# EAGLE board smp-mm (EAGLE 7.2.0)
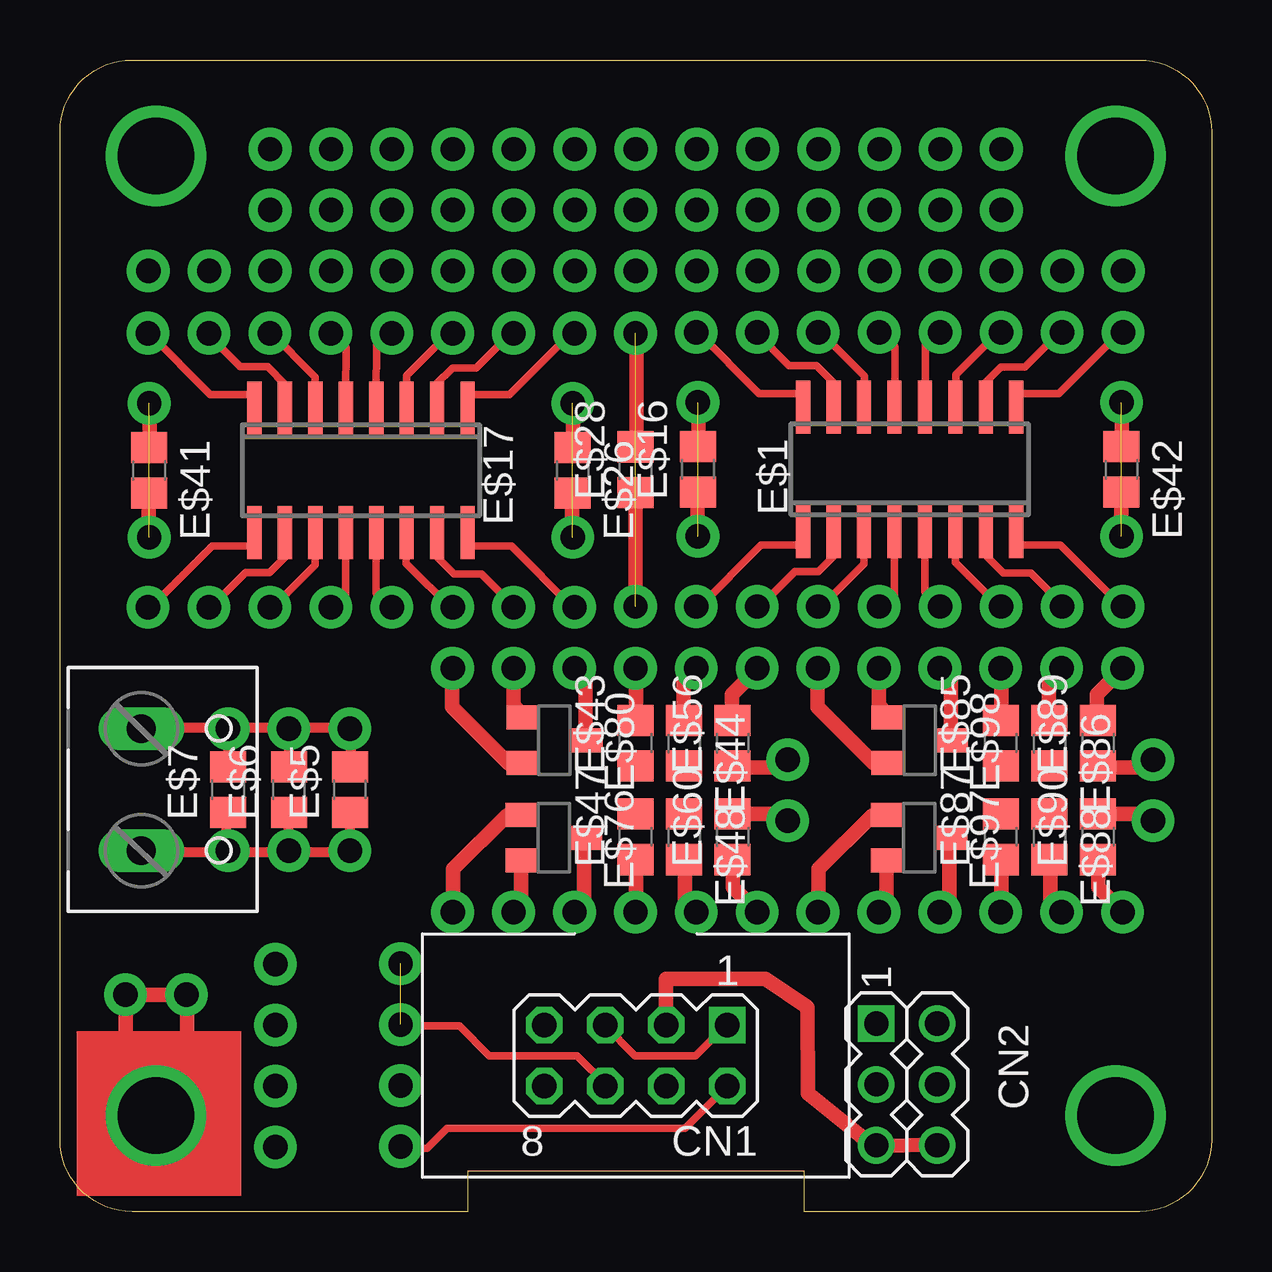
[diagram p0: board, top side]
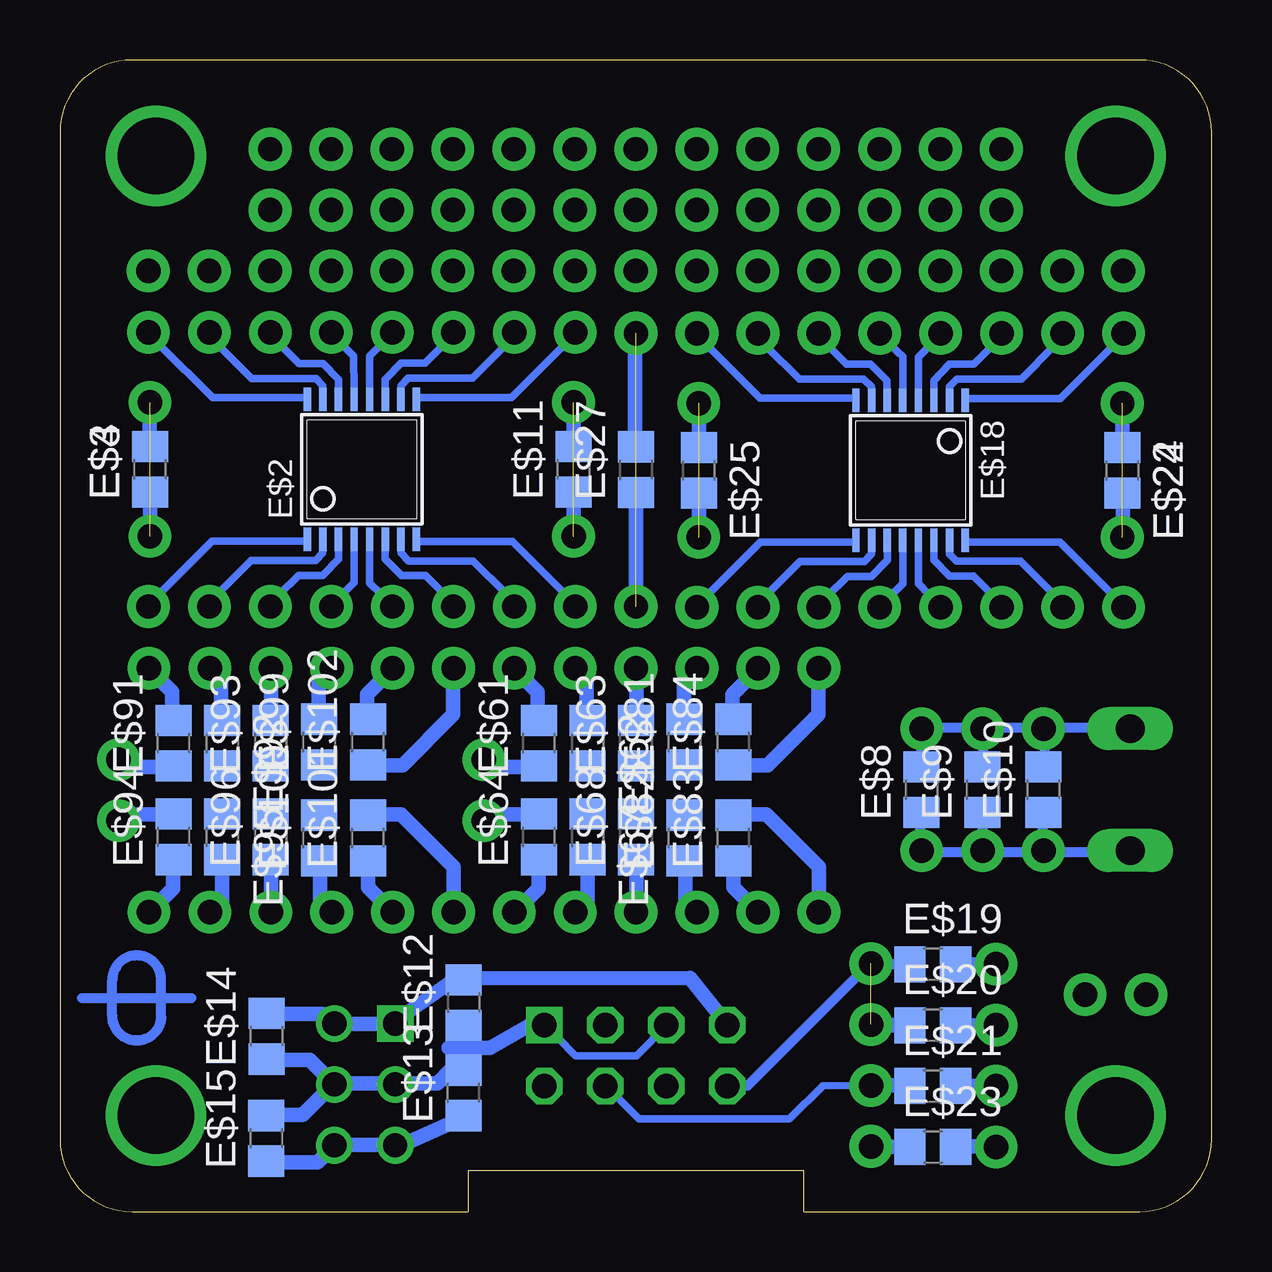
[diagram p1: board, bottom side, seen from below]

Size 48 x 48 mm. Coordinates in mm from the lower left corner, seen from the top.
Outline: 17,0 3,0 arc-90 0,3 0,45 arc-90 3,48 45,48 arc-90 48,45 48,3 arc-90 45,0 31,0 31,1.7 17,1.7 17,0
Copper layers (1*16): Top 0.035mm / dielectric 1.5mm / Bottom 0.035mm
Design rules "default *": minimum track width 10mil, minimum drill 24mil, track to track 12mil, track to pad 12mil, pad to pad 12mil, via to via 12mil, smd to smd 10mil, copper to edge 20mil, drill to drill 12mil, minimum pad ring 10mil, minimum via ring 8mil, stop-mask expansion 4mil, vias tented up to drill 29mil, thermal gap 10mil

## Footprints (pad centres in the part's own frame; a part is rotated, then mirrored left to right if it is on the bottom)
HDR-4X2 = drill 1.016 square: 1 -3.81,-1.27 | drill 1.016 octagon: 2 -3.81,1.27; 3 -1.27,-1.27; 4 -1.27,1.27; 5 1.27,-1.27; 6 1.27,1.27; 7 3.81,-1.27; 8 3.81,1.27
HDR-3X2 = drill 1.016 square: 1 -2.54,-1.27 | drill 1.016: 2 -2.54,1.27; 3 0,-1.27; 4 0,1.27; 5 2.54,-1.27; 6 2.54,1.27
TBLK-5.08-X2 = drill 1.194 long: 1 -2.54,-0.127; 2 2.54,-0.127
SO16 = smd 0.6 x 2.2: 1 -4.445,-2.6; 2 -3.175,-2.6; 3 -1.905,-2.6; 4 -0.635,-2.6; 5 0.635,-2.6; 6 1.905,-2.6; 7 3.175,-2.6; 8 4.445,-2.6; 9 4.445,2.6; 10 3.175,2.6; 11 1.905,2.6; 12 0.635,2.6; 13 -0.635,2.6; 14 -1.905,2.6; 15 -3.175,2.6; 16 -4.445,2.6
TSSOP16 = smd 0.305 x 0.991: 1 -2.275,-2.918; 2 -1.625,-2.918; 3 -0.975,-2.918; 4 -0.325,-2.918; 5 0.325,-2.918; 6 0.975,-2.918; 7 1.625,-2.918; 8 2.275,-2.918; 9 2.275,2.918; 10 1.625,2.918; 11 0.975,2.918; 12 0.325,2.918; 13 -0.325,2.918; 14 -0.975,2.918; 15 -1.625,2.918; 16 -2.275,2.918
C0805 = smd 1.3 x 1.5: 1 -0.95,0; 2 0.95,0
SOT23W = smd 1 x 1.4: 1 -0.95,-1.303; 2 0.95,-1.303; 3 0,1.303

## Placement (x,y rotation side)
CN1  [HDR-4X2]  24,6.5 180 top
CN2  HDR-3X2  [HDR-3X2]  35.3,5.3 270 top
CN3  [TBLK-5.08-X2]  3.51,17.59 270 top
E$1  [SO16]  35.42,30.93 0 top
E$2  [TSSOP16]  35.42,30.93 0 bottom
E$3  [C0805]  44.24,30.93 90 bottom
E$4  [C0805]  44.24,30.93 90 bottom
E$5  [C0805]  12.09,17.59 90 top
E$6  [C0805]  9.55,17.59 90 top
E$7  [C0805]  7.01,17.59 90 top
E$8  [C0805]  12.09,17.59 90 bottom
E$9  [C0805]  9.55,17.59 90 bottom
E$10  [C0805]  7.01,17.59 90 bottom
E$11  [C0805]  26.59,30.93 90 bottom
E$12  [C0805]  31.17,8.71 90 bottom
E$13  [C0805]  31.18,4.95 90 bottom
E$14  [C0805]  39.39,7.31 90 bottom
E$15  [C0805]  39.4,3.05 90 bottom
E$16  [C0805]  26.59,30.93 90 top
E$17  [SO16]  12.54,30.9 180 top
E$18  [TSSOP16]  12.54,30.9 180 bottom
E$19  [C0805]  11.62,10.31 0 bottom
E$20  [C0805]  11.62,7.77 0 bottom
E$21  [C0805]  11.62,5.23 0 bottom
E$22  [C0805]  3.72,30.9 270 bottom
E$23  [C0805]  11.62,2.69 0 bottom
E$24  [C0805]  3.72,30.9 270 bottom
E$25  [C0805]  21.37,30.9 270 bottom
E$26  [C0805]  21.37,30.9 270 top
E$27  [C0805]  23.99,30.92 90 bottom
E$28  [C0805]  23.99,30.92 90 top
E$41  [C0805]  3.72,30.9 270 top
E$42  [C0805]  44.24,30.93 270 top
E$43  [C0805]  23.99,19.52 90 top
E$44  [C0805]  26.02,19.52 270 top
E$47  [C0805]  23.99,15.62 90 top
E$48  [C0805]  26.02,15.62 270 top
E$56  [C0805]  28.04,19.52 90 top
E$60  [C0805]  28.04,15.62 90 top
E$61  [C0805]  28.04,19.52 90 bottom
E$62  [C0805]  26.01,19.52 270 bottom
E$63  [C0805]  23.99,19.52 90 bottom
E$64  [C0805]  28.04,15.62 90 bottom
E$67  [C0805]  26.01,15.62 270 bottom
E$68  [C0805]  23.99,15.62 90 bottom
E$76  [SOT23W]  20.58,15.58 270 top
E$80  [SOT23W]  20.61,19.64 270 top
E$81  [C0805]  21.97,19.57 90 bottom
E$82  [C0805]  21.97,15.57 90 bottom
E$83  [C0805]  19.94,15.57 90 bottom
E$84  [C0805]  19.94,19.57 90 bottom
E$85  [C0805]  39.21,19.52 90 top
E$86  [C0805]  41.25,19.52 270 top
E$87  [C0805]  39.21,15.62 90 top
E$88  [C0805]  41.25,15.62 270 top
E$89  [C0805]  43.27,19.52 90 top
E$90  [C0805]  43.27,15.62 90 top
E$91  [C0805]  43.27,19.52 90 bottom
E$92  [C0805]  41.23,19.52 270 bottom
E$93  [C0805]  39.21,19.52 90 bottom
E$94  [C0805]  43.27,15.62 90 bottom
E$95  [C0805]  41.23,15.62 270 bottom
E$96  [C0805]  39.21,15.62 90 bottom
E$97  [SOT23W]  35.81,15.58 270 top
E$98  [SOT23W]  35.84,19.64 270 top
E$99  [C0805]  37.2,19.57 90 bottom
E$100  [C0805]  37.2,15.57 90 bottom
E$101  [C0805]  35.16,15.57 90 bottom
E$102  [C0805]  35.16,19.57 90 bottom
U$1  [DPI-1]  44.8,8.9 90 bottom

## Library data of the parts
CN1 = dpi-conn; VENDOR: Digikey; VENDOR-PART-NUM: 609-3530-ND
CN2 = dpi-conn; VENDOR: Digikey; VENDOR-PART-NUM: 952-2120-ND
CN3 = dpi-conn; VENDOR: Digikey; VENDOR-PART-NUM: ED2609-ND
E$1 E$3-E$17 E$19-E$28 E$41-E$44 E$47 E$48 E$56 E$60-E$64 E$67 E$68 E$76 E$80-E$102 = smd-ipc
E$2 E$18 = ref-packages
U$1 = DP

## Nets
S$15: CN2.6

## Tracks (layer width: path | path; a pad name or v marks a point on that pad's centre or on a via)
MOUNT  (via drill 3.17 pad 3.17)
  other vias: 44,44
N$1
  Top 0.305: 39.9,34.1 41.63,34.1 44.23,36.69
N$2
  Top 0.305: 38.58,34.07 38.58,34.55 39.23,35.2 40.22,35.2 41.73,36.7
N$3
  Top 0.305: 37.34,34.35 37.34,34.88 39.18,36.71
N$4
  Top 0.305: 36.06,34.12 36.08,36.14 36.57,36.64
N$5
  Top 0.305: 30.96,34.1 29.14,34.1 26.6,36.65
N$6
  Top 0.305: 32.28,34.07 32.28,34.5 31.53,35.25 30.39,35.25 29,36.65
N$7
  Top 0.305: 33.52,34.35 33.52,34.82 31.62,36.74
N$8
  Top 0.305: 34.8,34.12 34.81,36.05 34.13,36.73
N$9
  Top 0.305: 30.95,27.77 29.22,27.77 26.63,25.18
N$10
  Top 0.305: 32.27,27.8 32.27,27.32 31.62,26.67 30.63,26.67 29.13,25.17
N$11
  Top 0.305: 33.51,27.52 33.51,26.98 31.68,25.16
N$12
  Top 0.305: 34.78,27.75 34.78,25.73 34.29,25.23
N$13
  Top 0.305: 39.89,27.77 41.7,27.77 44.26,25.22
N$14
  Top 0.305: 38.57,27.8 38.57,27.37 39.32,26.62 40.46,26.62 41.86,25.22
N$15
  Top 0.305: 37.32,27.52 37.32,27.05 39.24,25.13
N$16
  Top 0.305: 36.05,27.75 36.05,25.82 36.73,25.14
N$17
  Top 0.305: 8.06,27.73 6.33,27.73 3.74,25.14
N$18
  Top 0.305: 9.38,27.76 9.38,27.28 8.73,26.63 7.74,26.63 6.25,25.13
N$19
  Top 0.305: 10.63,27.48 10.63,26.95 8.8,25.12
N$20
  Top 0.305: 11.9,27.71 11.9,25.69 11.4,25.19
N$21
  Top 0.305: 17,27.73 18.82,27.73 21.37,25.18
N$22
  Top 0.305: 15.68,27.76 15.68,27.33 16.43,26.58 17.57,26.58 18.97,25.18
N$23
  Top 0.305: 14.44,27.48 14.44,27.01 16.36,25.09
N$24
  Top 0.305: 13.17,27.71 13.17,25.78 13.84,25.11
N$25
  Top 0.305: 17.02,34.06 18.74,34.06 21.35,36.65
N$26
  Top 0.305: 15.69,34.03 15.69,34.52 16.36,35.16 17.34,35.16 18.84,36.66
N$27
  Top 0.305: 14.45,34.31 14.45,34.85 16.29,36.67
N$28
  Top 0.305: 13.18,34.08 13.19,36.1 13.69,36.6
N$29
  Top 0.305: 8.07,34.06 6.26,34.06 3.72,36.61
N$30
  Top 0.305: 9.39,34.03 9.39,34.47 8.66,35.22 7.51,35.22 6.12,36.61
N$31
  Top 0.305: 10.64,34.31 10.64,34.78 8.73,36.7
N$32
  Top 0.305: 11.91,34.08 11.92,36.02 11.25,36.69
N$46  (via drill 3.17 pad 3.17)
  other vias: 44,4
N$47  (via drill 3.17 pad 3.17)
  other vias: 4,44
S$1
  Bottom 0.406: 3.38,20.15 6.97,20.15 | 6.97,20.15 12.11,20.15 12.11,18.49 | 6.97,20.15 6.97,18.53
S$2
  Bottom 0.406: 9.5,20.13 9.54,20.13 9.54,18.45
S$3
  Bottom 0.406: 12.15,16.68 12.15,14.98 9.54,14.98 | 9.54,14.98 7.03,14.98 | 7.03,14.98 3.26,14.98 | 9.54,14.98 9.54,16.64 | 7.03,14.98 7.03,16.67 7.04,16.67 7.04,16.64
S$4
  Top 0.406: 3.36,14.98 6.96,14.98 | 6.96,14.98 12.1,14.98 12.1,16.65 | 6.96,14.98 6.96,16.61
S$5
  Top 0.406: 9.48,15.01 9.52,15.01 9.52,16.68
S$6
  Top 0.406: 12.14,18.45 12.14,20.15 9.52,20.15 | 9.52,20.15 7.02,20.15 | 7.02,20.15 3.25,20.15 | 9.52,20.15 9.52,18.5 | 7.02,20.15 7.02,18.46 7.03,18.46 7.03,18.5
S$7
  Bottom 0.61: 27.84,7.77 28.42,7.77 30.07,6.82 31.79,6.82
S$8
  Bottom 0.61: 36.65,5.34 32.27,5.34 31.71,5.9
S$9
  Top 0.61: 31.16,8.51 31.17,4.93 33.88,2.75 36.67,2.77
S$10  (via drill 3.17 pad 3.17)
  other vias: 4,4
S$11
  Bottom 0.61: 31.15,3.93 33.73,2.77 36.65,2.77 36.65,2.79
S$12
  Bottom 0.61: 36.63,7.79 37.08,8.23 39.4,8.23
S$13
  Bottom 0.61: 36.59,5.33 37.59,6.32 39.4,6.32
S$14
  Bottom 0.61: 36.59,5.31 37.88,4.03 39.44,4.03 39.44,4.08
S$15
  Bottom 0.61: CN2.6 37.27,2.06 39.38,2.06
S$16
  Bottom 0.61: 24.02,32.38 24.02,36.51 24,36.53
S$17
  Top 0.305: 22.79,5.25 21.55,6.5 17.89,6.5 16.65,7.75 14.39,7.75
S$18
  Bottom 0.305: 25.27,5.25 23.87,3.86 17.59,3.86 16.2,5.24 14.18,5.25
S$19
  Top 0.305: 27.82,5.24 26.05,3.46 16.13,3.46 15.3,2.64 14.35,2.64
S$20
  Bottom 0.61: 8.95,10.29 8.96,10.3 10.7,10.3
S$21
  Bottom 0.61: 8.99,7.78 9.01,7.76 10.68,7.76 10.65,7.78 10.64,7.78
S$22
  Bottom 0.61: 12.89,10.3 12.91,10.32
S$23
  Bottom 0.61: 13.24,7.78 13.27,7.76 14.02,7.77
S$24
  Bottom 0.61: 12.89,5.23 12.91,5.25 14.11,5.27
S$25
  Bottom 0.61: 12.9,2.68 12.91,2.69 14.11,2.7
S$26
  Bottom 0.61: 9.1,2.69 9.13,2.71 10.74,2.71
S$27
  Bottom 0.61: 8.89,5.22 8.9,5.23 10.77,5.23
S$28
  Top 0.61: 3.96,4.24 2.74,5.46 2.74,9.09
S$29
  Top 0.61: 4.09,4.24 5.29,5.45 5.29,9.06
S$30
  Bottom 0.61: 24,29.51 24,25.68
S$31
  Top 0.61: 24.02,32.23 24.02,36.13
S$32
  Top 0.61: 24,29.42 24,25.86 23.94,25.79
S$33
  Bottom 0.406: 14.3,10.29 19.34,5.24 19.83,5.24
S$34
  Bottom 0.406: 12.82,10.27 12.85,10.3 14.13,10.3
S$82
  Top 0.61: 44.23,28.13 44.23,29.91 44.21,29.91
S$83
  Top 0.61: 44.27,31.98 44.27,33.68 44.28,33.68
S$84
  Bottom 0.61: 44.26,31.84 44.26,33.59
S$85
  Bottom 0.61: 44.24,28.08 44.24,29.77
S$86
  Top 0.61: 26.58,28.13 26.58,29.91 26.55,29.91
S$87
  Top 0.61: 26.62,31.98 26.62,33.68 26.63,33.68
S$88
  Bottom 0.61: 26.6,31.84 26.6,33.59
S$89
  Bottom 0.61: 26.59,28.08 26.59,29.77
S$90
  Bottom 0.305: 37.68,33.92 41.64,33.92 43.86,36.13
S$91
  Bottom 0.305: 37.04,34.22 37.04,34.43 37.32,34.72 40,34.72 41.39,36.09
S$92
  Bottom 0.305: 36.4,34.26 36.4,34.67 37.03,35.34 38.03,35.34 38.87,36.17
S$93
  Bottom 0.305: 35.75,34.25 35.76,35.65 36.19,36.1
S$94
  Bottom 0.305: 33.11,27.93 29.14,27.93 26.93,25.71
S$95
  Bottom 0.305: 33.79,27.66 33.79,27.45 33.46,27.12 30.78,27.12 29.41,25.75
S$96
  Bottom 0.305: 34.44,27.59 34.44,27.19 33.75,26.5 32.75,26.5 31.93,25.68
S$97
  Bottom 0.305: 35.1,27.59 35.1,26.2 34.6,25.74
S$98
  Top 0.61: 23.97,29.89 23.95,29.89
S$108
  Bottom 0.61: 33.85,7.82 36.66,7.82
S$109
  Top 0.61: 25.26,7.75 25.26,9.7 29.41,9.7 31.12,8.53
S$111
  Bottom 0.61: 20.16,7.77 21.75,9.74 30.92,9.73
S$112
  Top 0.305: 22.69,7.78 23.97,6.5 26.49,6.5 27.79,7.79
S$113
  Bottom 0.305: 22.69,7.78 23.97,6.5 26.5,6.5 27.28,7.28 27.29,7.28
S$114
  Bottom 0.61: 34,7.8 33.46,8.35 31.54,9.69
S$115
  Top 0.61: 21.47,22.62 21.9,22.18 21.9,19.73
S$116
  Bottom 0.305: 33.13,33.93 29.17,33.93 26.97,36.14
S$117
  Bottom 0.305: 33.79,34.22 33.79,34.43 33.49,34.73 30.81,34.73 29.45,36.1
S$118
  Bottom 0.305: 34.45,34.27 34.45,34.68 33.78,35.35 32.78,35.35 31.96,36.18
S$119
  Bottom 0.305: 35.09,34.26 35.1,35.66 34.64,36.12
S$120
  Top 0.61: 24,22.64 24.01,22.63 24.01,20.62
S$121
  Top 0.61: 26.54,22.69 25.98,22.13 25.98,20.62
S$122
  Top 0.61: 29.08,22.64 28,21.56 28,20.57 27.99,20.58
S$123
  Top 0.61: 30.36,18.88 29.99,18.51 28.11,18.51 28.13,18.53
S$124
  Top 0.61: 30.36,16.29 30.08,16.57 28.08,16.57
S$125
  Top 0.61: 29.05,12.51 28.05,13.51 28.05,14.55
S$126
  Top 0.61: 26.5,12.51 26.05,12.96 26.05,14.55
S$127
  Top 0.61: 24.02,12.46 24.01,12.47 24.01,14.53
S$128
  Bottom 0.61: 26.5,22.62 26.05,22.16 26.05,20.52
S$129
  Bottom 0.61: 23.97,22.64 23.96,22.63 23.96,20.62
S$130
  Bottom 0.61: 21.43,22.69 21.99,22.13 21.99,20.62
S$131
  Bottom 0.61: 18.89,22.64 19.97,21.56 19.97,20.57 19.99,20.58
S$132
  Bottom 0.61: 30.34,18.89 29.98,18.54 28.04,18.54 28.04,18.57
S$133
  Bottom 0.61: 30.25,16.25 29.94,16.56 28.15,16.56 28.19,16.6 28.2,16.6
S$134
  Bottom 0.61: 19.86,18.51 19.85,18.53
S$135
  Top 0.61: 18.89,18.68 18.7,18.68 16.34,21.04 16.34,22.07 16.32,22.1
S$136
  Bottom 0.61: 18.92,12.51 19.92,13.51 19.92,14.55
S$137
  Bottom 0.61: 21.47,12.51 21.93,12.96 21.93,14.55
S$138
  Bottom 0.61: 23.95,12.46 23.96,12.47 23.96,14.53
S$139
  Bottom 0.61: 26.48,12.48 26.01,12.95 26.01,14.6
S$140
  Bottom 0.61: 29.05,12.46 28.05,13.46 28.05,14.6
S$141
  Bottom 0.61: 19.85,18.51 19.83,18.53
S$142
  Top 0.61: 18.97,16.51 18.63,16.51 16.39,14.27 16.39,12.76 16.37,12.74
S$143
  Bottom 0.61: 19.33,18.6 18.5,18.6 16.39,20.71 16.39,21.94
S$144
  Bottom 0.61: 19.35,16.55 18.55,16.55 16.37,14.36 16.37,13.02
S$145
  Top 0.61: 18.86,12.48 19.23,12.85 19.23,14.51
S$146
  Top 0.61: 21.42,12.39 21.85,12.82 21.85,15.48
S$147
  Top 0.61: 36.7,22.62 37.13,22.18 37.13,19.73
S$148
  Top 0.61: 39.23,22.64 39.24,22.63 39.24,20.62
S$149
  Top 0.61: 41.77,22.69 41.21,22.13 41.21,20.62
S$150
  Top 0.61: 44.31,22.64 43.23,21.56 43.23,20.57 43.22,20.58
S$151
  Top 0.61: 45.59,18.88 45.22,18.51 43.34,18.51 43.35,18.53
S$152
  Bottom 0.305: 37.7,27.94 41.67,27.94 43.88,25.73
S$153
  Bottom 0.305: 37.04,27.64 37.04,27.44 37.35,27.14 40.03,27.14 41.4,25.77
S$154
  Bottom 0.305: 36.38,27.59 36.38,27.19 37.06,26.52 38.06,26.52 38.88,25.69
S$155
  Bottom 0.305: 35.75,27.61 35.75,26.21 36.2,25.75
S$156
  Top 0.61: 3.73,33.7 3.73,31.93 3.76,31.93
S$157
  Top 0.61: 3.69,29.86 3.69,28.15 3.68,28.15
S$158
  Bottom 0.61: 3.71,30 3.71,28.24
S$159
  Bottom 0.61: 3.72,33.75 3.72,32.06
S$160
  Top 0.61: 21.38,33.7 21.38,31.93 21.41,31.93
S$161
  Top 0.61: 21.35,29.86 21.35,28.15 21.33,28.15
S$162
  Bottom 0.61: 21.36,30 21.36,28.24
S$163
  Bottom 0.61: 21.37,33.75 21.37,32.06
S$164
  Bottom 0.305: 10.28,27.91 6.32,27.91 4.11,25.7
S$165
  Bottom 0.305: 10.92,27.61 10.92,27.4 10.64,27.11 7.96,27.11 6.59,25.74
S$166
  Bottom 0.305: 11.57,27.57 11.57,27.16 10.93,26.49 9.93,26.49 9.1,25.66
S$167
  Bottom 0.305: 12.21,27.58 12.21,26.18 11.78,25.73
S$168
  Bottom 0.305: 14.86,33.91 18.82,33.91 21.04,36.12
S$169
  Bottom 0.305: 14.17,34.17 14.17,34.38 14.5,34.71 17.18,34.71 18.56,36.08
S$170
  Bottom 0.305: 13.52,34.24 13.52,34.64 14.22,35.33 15.22,35.33 16.05,36.15
S$171
  Bottom 0.305: 12.86,34.24 12.88,35.63 13.37,36.09
S$172
  Bottom 0.305: 14.83,27.9 18.79,27.9 21,25.69
S$173
  Bottom 0.305: 14.17,27.61 14.17,27.4 14.47,27.1 17.16,27.1 18.53,25.73
S$174
  Bottom 0.305: 13.51,27.56 13.51,27.15 14.18,26.48 15.19,26.48 16.01,25.65
S$175
  Bottom 0.305: 12.88,27.57 12.88,26.17 13.33,25.71
S$176
  Bottom 0.305: 10.26,33.89 6.3,33.89 4.1,36.1
S$177
  Bottom 0.305: 10.92,34.19 10.92,34.39 10.61,34.69 7.93,34.69 6.58,36.07
S$178
  Bottom 0.305: 11.58,34.24 11.58,34.64 10.92,35.32 9.92,35.32 9.09,36.14
S$179
  Bottom 0.305: 12.21,34.22 12.23,35.62 11.77,36.08
S$180
  Top 0.61: 45.59,16.29 45.31,16.57 43.3,16.57
S$181
  Top 0.61: 44.28,12.51 43.28,13.51 43.28,14.55
S$182
  Top 0.61: 41.73,12.51 41.27,12.96 41.27,14.55
S$183
  Top 0.61: 39.25,12.46 39.24,12.47 39.24,14.53
S$184
  Bottom 0.61: 41.73,22.62 41.27,22.16 41.27,20.52
S$185
  Bottom 0.61: 39.2,22.64 39.19,22.63 39.19,20.62
S$186
  Bottom 0.61: 36.66,22.69 37.22,22.13 37.22,20.62
S$187
  Bottom 0.61: 34.12,22.64 35.2,21.56 35.2,20.57 35.21,20.58
S$188
  Bottom 0.61: 45.56,18.89 45.21,18.54 43.27,18.54 43.27,18.57
S$189
  Bottom 0.61: 45.48,16.25 45.17,16.56 43.38,16.56 43.42,16.6 43.43,16.6
S$190
  Bottom 0.61: 35.09,18.51 35.07,18.53
S$191
  Bottom 0.61: 34.15,12.51 35.15,13.51 35.15,14.55
S$192
  Bottom 0.61: 36.7,12.51 37.16,12.96 37.16,14.55
S$193
  Bottom 0.61: 39.18,12.46 39.19,12.47 39.19,14.53
S$194
  Bottom 0.61: 41.7,12.48 41.23,12.95 41.23,14.6
S$195
  Bottom 0.61: 44.28,12.46 43.28,13.46 43.28,14.6
S$196
  Bottom 0.61: 35.07,18.51 35.06,18.53
S$197
  Top 0.61: 34.08,12.48 34.45,12.85 34.45,14.51
S$198
  Top 0.61: 36.65,12.39 37.08,12.82 37.08,15.48
S$199
  Top 0.61: 34.12,18.68 33.93,18.68 31.57,21.04 31.57,22.07 31.54,22.1
S$200
  Top 0.61: 34.2,16.51 33.85,16.51 31.62,14.27 31.62,12.76 31.59,12.74
S$201
  Bottom 0.61: 34.55,18.6 33.73,18.6 31.62,20.71 31.62,21.94
S$202
  Bottom 0.61: 34.58,16.55 33.78,16.55 31.59,14.36 31.59,13.02
WW1  (via drill 1.02 pad 1.78)
  other vias: 26.53,25.22
WW4  (via drill 1.02 pad 1.78)
  other vias: 26.53,36.65
WW5  (via drill 1.02 pad 1.78)
  other vias: 29.07,25.22
WW6  (via drill 1.02 pad 1.78)
  Top 0.61: v2.73,9.04 v5.27,9.04
WW9  (via drill 1.02 pad 1.78)  (1 unrouted)
  other vias: 23.99,36.61 23.99,25.22
WW10  (via drill 1.02 pad 1.78)
  other vias: 3.68,39.2
WW11  (via drill 1.02 pad 1.78)
  Top 0.61: v18.91,22.64 18.91,21.09 19.25,20.75
WW12  (via drill 1.02 pad 1.78)
  other vias: 21.45,22.64
WW13  (via drill 1.02 pad 1.78)
  other vias: 29.07,36.65
WW14  (via drill 1.02 pad 1.78)
  other vias: 31.61,25.22
WW15  (via drill 1.02 pad 1.78)
  other vias: 31.61,36.65
WW16  (via drill 1.02 pad 1.78)
  other vias: 34.15,25.22
WW17  (via drill 1.02 pad 1.78)
  other vias: 34.15,36.65
WW18  (via drill 1.02 pad 1.78)
  other vias: 36.69,25.22
WW19  (via drill 1.02 pad 1.78)
  other vias: 23.99,22.64
WW20  (via drill 1.02 pad 1.78)
  other vias: 26.53,22.64
WW21  (via drill 1.02 pad 1.78)
  other vias: 29.07,22.64
WW22  (via drill 1.02 pad 1.78)
  other vias: 18.91,12.48
WW23  (via drill 1.02 pad 1.78)
  other vias: 6.22,39.2
WW24  (via drill 1.02 pad 1.78)
  other vias: 36.69,36.65
WW25  (via drill 1.02 pad 1.78)
  other vias: 39.23,25.22
WW26  (via drill 1.02 pad 1.78)
  other vias: 39.23,36.65
WW27  (via drill 1.02 pad 1.78)
  other vias: 41.77,25.22
WW28  (via drill 1.02 pad 1.78)
  other vias: 21.45,12.48
WW29  (via drill 1.02 pad 1.78)
  other vias: 23.99,12.48
WW30  (via drill 1.02 pad 1.78)
  other vias: 41.77,36.65
WW31  (via drill 1.02 pad 1.78)
  other vias: 44.31,25.22
WW32  (via drill 1.02 pad 1.78)
  other vias: 26.53,12.48
WW33  (via drill 1.02 pad 1.78)
  other vias: 29.07,12.48
WW34  (via drill 1.02 pad 1.78)
  other vias: 16.37,12.48
WW35  (via drill 1.02 pad 1.78)
  other vias: 16.37,22.64
WW36  (via drill 1.02 pad 1.78)
  other vias: 8.76,39.2
WW37  (via drill 1.02 pad 1.78)
  other vias: 8.76,41.74
WW38  (via drill 1.02 pad 1.78)
  other vias: 8.76,44.28
WW39  (via drill 1.02 pad 1.78)
  other vias: 30.34,16.29
WW40  (via drill 1.02 pad 1.78)
  other vias: 30.34,18.83
WW41  (via drill 1.02 pad 1.78)
  other vias: 44.31,36.65
WW42  (via drill 1.02 pad 1.78)
  other vias: 7.01,15.05
WW43  (via drill 1.02 pad 1.78)
  other vias: 8.98,2.69
WW44  (via drill 1.02 pad 1.78)
  other vias: 7.01,20.13
WW45
  Bottom 0.61: 29.07,22.64 28.09,21.66 28.09,20.57
WW46  (via drill 1.02 pad 1.78)
  Top 0.61: v34.13,22.64 34.13,21.09 34.48,20.75
WW49  (via drill 1.02 pad 1.78)
  other vias: 11.3,39.2
WW50  (via drill 1.02 pad 1.78)
  other vias: 11.3,41.74
WW51  (via drill 1.02 pad 1.78)
  other vias: 11.3,44.28
WW52  (via drill 1.02 pad 1.78)  (1 unrouted)
  other vias: 44.24,33.73 44.24,28.14
WW53  (via drill 1.02 pad 1.78)
  other vias: 9.55,15.05
WW54  (via drill 1.02 pad 1.78)  (1 unrouted)
  other vias: 26.59,33.73 26.59,28.14
WW55  (via drill 1.02 pad 1.78)
  other vias: 21.45,36.61
WW56  (via drill 1.02 pad 1.78)
  other vias: 8.98,5.23
WW57  (via drill 1.02 pad 1.78)
  other vias: 21.45,25.18
WW58  (via drill 1.02 pad 1.78)
  other vias: 18.91,36.61
WW59  (via drill 1.02 pad 1.78)
  other vias: 18.91,25.18
WW60  (via drill 1.02 pad 1.78)
  other vias: 16.37,36.61
WW61  (via drill 1.02 pad 1.78)
  other vias: 16.37,25.18
WW62  (via drill 1.02 pad 1.78)
  other vias: 13.84,39.2
WW63  (via drill 1.02 pad 1.78)
  other vias: 13.84,41.74
WW64  (via drill 1.02 pad 1.78)
  other vias: 13.84,44.28
WW65  (via drill 1.02 pad 1.78)
  other vias: 13.83,36.61
WW66  (via drill 1.02 pad 1.78)
  other vias: 9.55,20.13
WW67  (via drill 1.02 pad 1.78)
  other vias: 13.83,25.18
WW68  (via drill 1.02 pad 1.78)
  other vias: 11.29,36.61
WW69  (via drill 1.02 pad 1.78)
  other vias: 12.09,15.05
WW70  (via drill 1.02 pad 1.78)
  other vias: 11.29,25.18
WW71  (via drill 1.02 pad 1.78)
  other vias: 8.75,36.61
WW72  (via drill 1.02 pad 1.78)
  other vias: 8.75,25.18
WW73  (via drill 1.02 pad 1.78)
  other vias: 6.21,36.61
WW74  (via drill 1.02 pad 1.78)
  other vias: 6.21,25.18
WW75  (via drill 1.02 pad 1.78)
  other vias: 16.38,39.2
WW76  (via drill 1.02 pad 1.78)
  other vias: 16.38,41.74
WW77  (via drill 1.02 pad 1.78)
  other vias: 16.38,44.28
WW78  (via drill 1.02 pad 1.78)
  other vias: 3.67,36.61
WW79  (via drill 1.02 pad 1.78)
  other vias: 8.98,7.77
WW80  (via drill 1.02 pad 1.78)
  other vias: 12.09,20.13
WW81  (via drill 1.02 pad 1.78)
  other vias: 8.98,10.31
WW82  (via drill 1.02 pad 1.78)
  other vias: 14.2,2.72
WW83  (via drill 1.02 pad 1.78)
  other vias: 3.67,25.18
WW84  (via drill 1.02 pad 1.78)  (1 unrouted)
  other vias: 3.72,28.1 3.72,33.69
WW85  (via drill 1.02 pad 1.78)  (1 unrouted)
  other vias: 21.37,28.1 21.37,33.69
WW86  (via drill 1.02 pad 1.78)
  other vias: 36.67,22.64
WW87  (via drill 1.02 pad 1.78)
  other vias: 39.21,22.64
WW88  (via drill 1.02 pad 1.78)
  other vias: 18.92,39.2
WW89  (via drill 1.02 pad 1.78)
  other vias: 18.92,41.74
WW90  (via drill 1.02 pad 1.78)
  other vias: 18.92,44.28
WW91  (via drill 1.02 pad 1.78)
  other vias: 41.75,22.64
WW92  (via drill 1.02 pad 1.78)
  other vias: 14.2,5.26
WW93  (via drill 1.02 pad 1.78)  (1 unrouted)
  other vias: 14.2,7.8 14.2,10.34
WW94  (via drill 1.02 pad 1.78)
  other vias: 21.46,39.2
WW95  (via drill 1.02 pad 1.78)
  other vias: 24,39.2
WW96  (via drill 1.02 pad 1.78)
  other vias: 44.29,22.64
WW97  (via drill 1.02 pad 1.78)
  other vias: 34.13,12.48
WW98  (via drill 1.02 pad 1.78)
  other vias: 36.67,12.48
WW99  (via drill 1.02 pad 1.78)
  other vias: 39.21,12.48
WW100  (via drill 1.02 pad 1.78)
  other vias: 41.75,12.48
WW101  (via drill 1.02 pad 1.78)
  other vias: 26.54,39.2
WW102  (via drill 1.02 pad 1.78)
  other vias: 21.46,41.74
WW103  (via drill 1.02 pad 1.78)
  other vias: 21.46,44.28
WW104  (via drill 1.02 pad 1.78)
  other vias: 44.29,12.48
WW105  (via drill 1.02 pad 1.78)
  other vias: 29.08,39.2
WW106  (via drill 1.02 pad 1.78)
  other vias: 31.62,39.2
WW107  (via drill 1.02 pad 1.78)
  other vias: 34.16,39.2
WW109  (via drill 1.02 pad 1.78)
  other vias: 31.59,12.48
WW110  (via drill 1.02 pad 1.78)
  other vias: 31.59,22.64
WW111  (via drill 1.02 pad 1.78)
  other vias: 45.56,16.29
WW112  (via drill 1.02 pad 1.78)
  other vias: 45.56,18.83
WW113
  Bottom 0.61: 44.29,22.64 43.32,21.66 43.32,20.57
WW114  (via drill 1.02 pad 1.78)
  other vias: 36.7,39.2
WW115  (via drill 1.02 pad 1.78)
  other vias: 24,41.74
WW116  (via drill 1.02 pad 1.78)
  other vias: 24,44.28
WW117  (via drill 1.02 pad 1.78)
  other vias: 39.24,39.2
WW118  (via drill 1.02 pad 1.78)
  other vias: 41.78,39.2
WW120  (via drill 1.02 pad 1.78)
  other vias: 44.32,39.2
WW128  (via drill 1.02 pad 1.78)
  other vias: 26.54,41.74
WW129  (via drill 1.02 pad 1.78)
  other vias: 26.54,44.28
WW141  (via drill 1.02 pad 1.78)
  other vias: 29.08,41.74
WW142  (via drill 1.02 pad 1.78)
  other vias: 29.08,44.28
WW154  (via drill 1.02 pad 1.78)
  other vias: 31.62,41.74
WW155  (via drill 1.02 pad 1.78)
  other vias: 31.62,44.28
WW167  (via drill 1.02 pad 1.78)
  other vias: 34.16,41.74
WW168  (via drill 1.02 pad 1.78)
  other vias: 34.16,44.28
WW180  (via drill 1.02 pad 1.78)
  other vias: 36.7,41.74
WW181  (via drill 1.02 pad 1.78)
  other vias: 36.7,44.28
WW193  (via drill 1.02 pad 1.78)
  other vias: 39.24,41.74
WW194  (via drill 1.02 pad 1.78)
  other vias: 39.24,44.28
(copper drawn outside any net)
  shapes: Top area x1

## Text on the board
tTest: (C) 2021 Demand Peripherals, Inc. | 8 | 6 | 5.0 | 4 | Gnd | 2 | SMP, Rev 21A | 3.3